# Altium PCB PCB2.pcbdoc
Units mil, origin at the board's own origin, x right, y up, seen from the top; angles counter-clockwise.
Board outline 6141.12 x 9387.74 mil, 2 copper layers (Top Layer, Bottom Layer); 120 components, 101 nets, 359 pads, 4 vias.
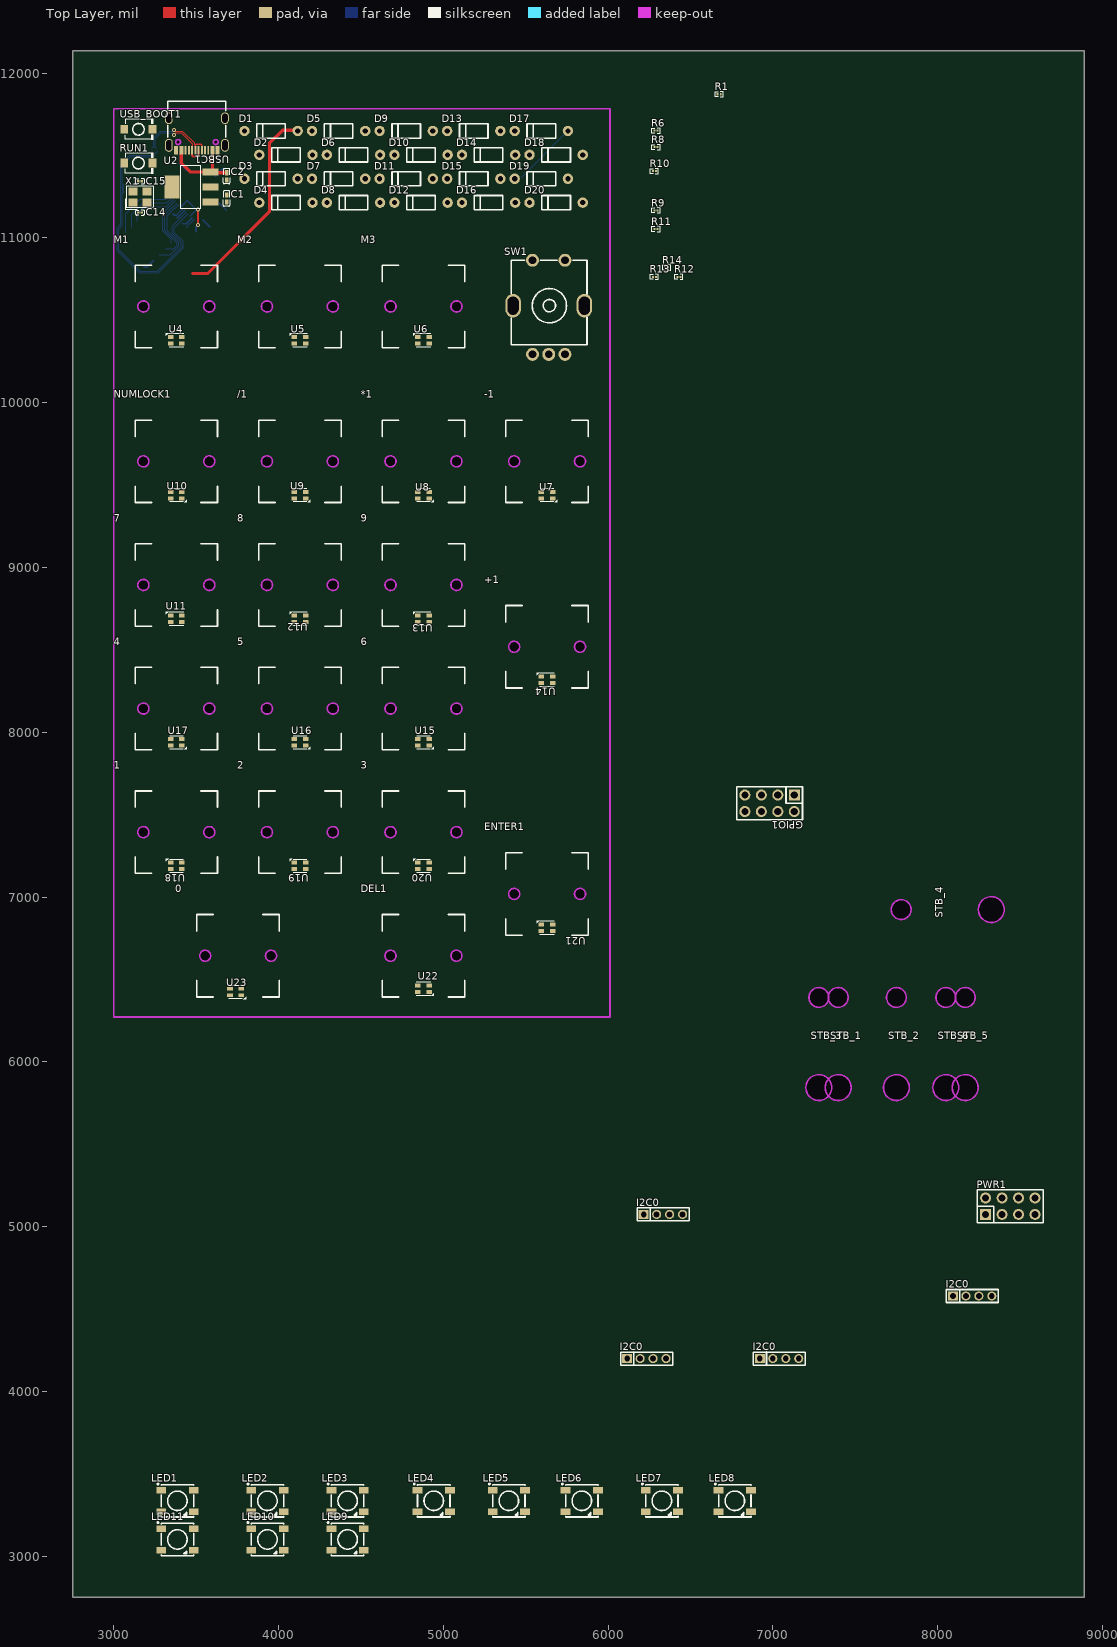
[diagram p0: Top Layer view]
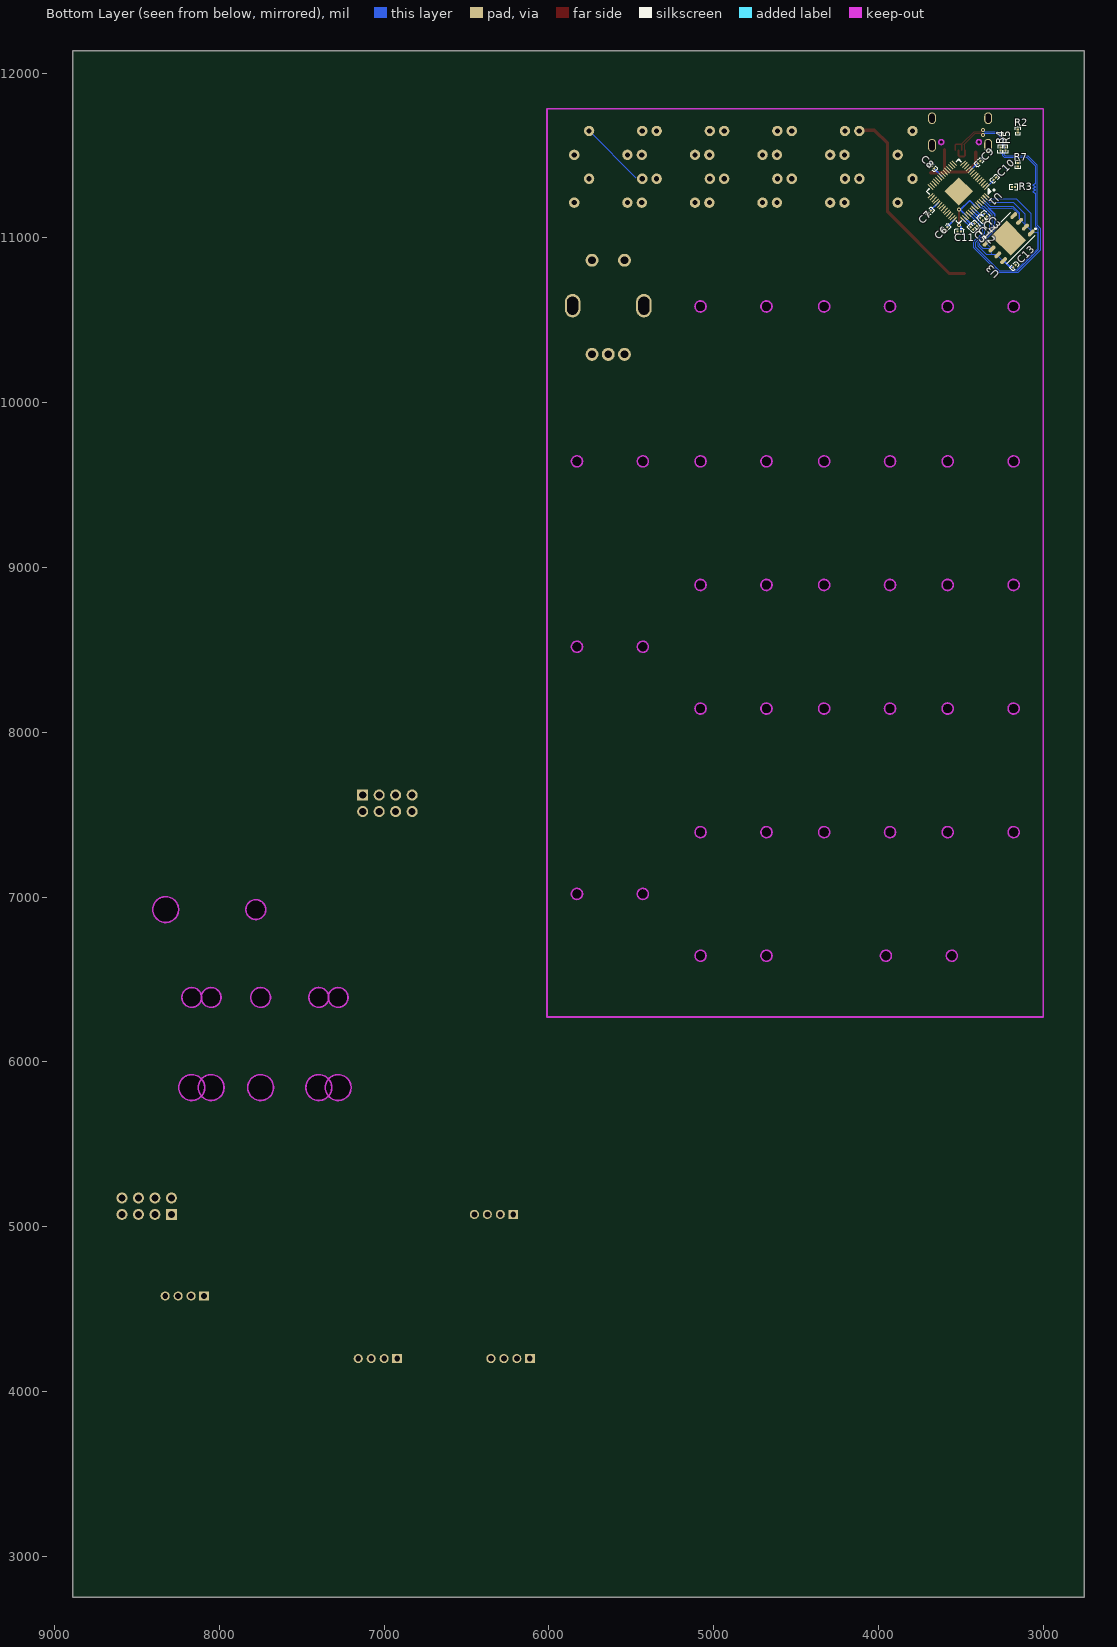
[diagram p1: Bottom Layer view, seen from below]

## Layer stack, top to bottom
Top Layer: signal copper (thickness not stored)
Dielectric: dielectric 12.6, FR-4, Dk 4.8
Bottom Layer: signal copper (thickness not stored)

## Board outline
8891.12,2750 2750,2750 2750,12137.74 8891.12,12137.74

## Design rules (kind name [scope] priority, off if disabled: settings)
BoardOutlineClearance copperThickness1oz [All] p0: genericclearance=10 ignorepadtopadclearanceinfootprint=FALSE except(0: Arc-SplitContinuation Track-SplitContinuation SMDPad-SplitContinuation THPad-SplitContinuation Via-SplitContinuation Fill-SplitContinuation Poly-SplitContinuation Region-SplitContinuation Text-SplitContinuation; 6: Track-CutoutEdge SMDPad-CutoutEdge THPad-CutoutEdge Via-CutoutEdge Fill-CutoutEdge Region-CutoutEdge; 11.8: Track-OutlineEdge SMDPad-OutlineEdge THPad-OutlineEdge Via-OutlineEdge Fill-OutlineEdge Region-OutlineEdge Poly-OutlineEdge Text-OutlineEdge)
BoardOutlineClearance copperThickness2oz [All] p0: genericclearance=10 ignorepadtopadclearanceinfootprint=FALSE except(0: Arc-SplitContinuation Track-SplitContinuation SMDPad-SplitContinuation THPad-SplitContinuation Via-SplitContinuation Fill-SplitContinuation Poly-SplitContinuation Region-SplitContinuation Text-SplitContinuation; 6: Track-CutoutEdge SMDPad-CutoutEdge THPad-CutoutEdge Via-CutoutEdge Fill-CutoutEdge Region-CutoutEdge; 11.8: Track-OutlineEdge SMDPad-OutlineEdge THPad-OutlineEdge Via-OutlineEdge Fill-OutlineEdge Region-OutlineEdge Poly-OutlineEdge Text-OutlineEdge)
Clearance copperThickness1oz [(InNet('23') OR InNet('24') OR InNet('25') OR InNet('26') OR InNet('27') OR InNet('29') OR InNet('3.3V') OR InNet('R1') OR InNet('R2') OR InNet('R3') OR InNet('R4') OR InNet('R5') OR InNet('R6') OR InNet('C1') OR InNet('C2') OR InNet('C3') OR InNet('C4') OR InNet('GND') OR InNet('XIN') OR InNet('XOUT') OR InNet('1.1V') OR InNet('SWCLK') OR InNet('SWD') OR InNet('$1N4934') OR InNet('SDA0') OR InNet('SCL0') OR InNet('DINUGRGB') OR InNet('DINPKRGB') OR InNet('$1N4906') OR InNet('$1N4905') OR InNet('QSPI_SD3') OR InNet('QSPI_SCLK') OR InNet('QSPI_SD0') OR InNet('QSPI_SD2') OR InNet('QSPI_SD1') OR InNet('QSPI_SS') OR InNet('VCC') OR InNet('DN') OR InNet('DP') OR InNet('$1N4900') OR InNet('$1N4960') OR InNet('$1N7769') OR InNet('$1N7974') OR InNet('$1N7930') OR InNet('$1N7902') OR InNet('$1N8059') OR InNet('$1N9359') OR InNet('$1N9364') OR InNet('$1N9369') OR InNet('$1N9374') OR InNet('$1N9379') OR InNet('$1N9391') OR InNet('$1N9396') OR InNet('$1N9405') OR InNet('$1N9410') OR InNet('$1N9460') OR InNet('$1N9455') OR InNet('$1N9450') OR InNet('$1N4922') OR InNet('$1N4923') OR InNet('$1N4924') OR InNet('$1N4925') OR InNet('$1N4926') OR InNet('$1N4927') OR InNet('$1N4928') OR InNet('$1N9445') OR InNet('$1N9440') OR InNet('$1N9435') OR InNet('$1N9430') OR InNet('$1N9425') OR InNet('$1N9420') OR InNet('$1N9415') OR InNet('+5V') OR InNet('$1N14177') OR InNet('$1N14172') OR InNet('$1N14167') OR InNet('$1N14162') OR InNet('$1N14157') OR InNet('$1N14152') OR InNet('$1N14147') OR InNet('$1N14142') OR InNet('$1N14132') OR InNet('$1N14137') OR InNet('ENCA') OR InNet('ENCB') OR InNet('ENCSW') OR InNet('$1N17828') OR InNet('$1N17831') OR InNet('$1N17877') OR InNet('$1N17918') OR InNet('$1N17901') OR InNet('$1N17953') OR InNet('$1N18004') OR InNet('$1N18027') OR InNet('$1N18061') OR InNet('$1N18142') OR InNet('$1N18187') OR InNet('$1N18170') OR InNet('$1N18112') OR InNet('$1N18211') OR InNet('$1N18228'))] p1: gap=7 ignorepadtopadclearanceinfootprint=FALSE except(4: Track-Track; 6: Track-SMDPad SMDPad-SMDPad Track-THPad SMDPad-THPad THPad-THPad Track-Via SMDPad-Via THPad-Via Via-Via Track-Fill SMDPad-Fill THPad-Fill Via-Fill Fill-Fill Track-Region SMDPad-Region THPad-Region Via-Region Fill-Region Region-Region Track-Poly SMDPad-Poly THPad-Poly Via-Poly Fill-Poly Region-Poly Poly-Poly Track-Text SMDPad-Text THPad-Text Via-Text Fill-Text Region-Text Poly-Text Text-Text Track-Hole SMDPad-Hole THPad-Hole Via-Hole Fill-Hole Region-Hole Poly-Hole Text-Hole; 11.8: Track-Sheet SMDPad-Sheet THPad-Sheet Via-Sheet Fill-Sheet Region-Sheet Poly-Sheet Text-Sheet Sheet-Hole)
Clearance copperThickness2oz [All] p1: gap=7 ignorepadtopadclearanceinfootprint=FALSE except(6: Track-SMDPad SMDPad-SMDPad Track-THPad SMDPad-THPad THPad-THPad Track-Via SMDPad-Via THPad-Via Via-Via Track-Fill SMDPad-Fill THPad-Fill Via-Fill Fill-Fill Track-Region SMDPad-Region THPad-Region Via-Region Fill-Region Region-Region Track-Poly SMDPad-Poly THPad-Poly Via-Poly Fill-Poly Region-Poly Poly-Poly Track-Text SMDPad-Text THPad-Text Via-Text Fill-Text Region-Text Poly-Text Text-Text Track-Hole SMDPad-Hole THPad-Hole Via-Hole Fill-Hole Region-Hole Poly-Hole Text-Hole; 8: Track-Track; 11.8: Track-Sheet SMDPad-Sheet THPad-Sheet Via-Sheet Fill-Sheet Region-Sheet Poly-Sheet Text-Sheet Sheet-Hole)
DiffPairsRouting differentialPair [All] p1: maxuncoupledlength=10 minlimit=5.9843 maxlimit=5.9843 mostfreqgap=5.9843 toplayer_minwidth=5 toplayer_prefwidth=10 toplayer_maxwidth=100 bottomlayer_minwidth=5 bottomlayer_prefwidth=10 bottomlayer_maxwidth=100
PasteMaskExpansion pasteMaskExpansion [All] p1: expansion=0
PlaneConnect innerPlane [All] p1: planeconnectstyle=Relief reliefexpansion=20 reliefentries=4 reliefconductorwidth=10 reliefairgap=10
PolygonConnect copperRegion [All] p1: connectstyle=Direct reliefentries=4 reliefconductorwidth=10 polygonreliefangle="90 Angle" airgapwidth=10
RoutingVias viaSize [All] p1: viastyle="Through Hole" holewidth=12.0078 minholewidth=11.811 maxholewidth=248.0314 width=24.0158 minwidth=19.685 maxwidth=393.7008
SolderMaskExpansion solderMaskExpansion [All] p1: useseparateexpansions=TRUE expansion=2.0079 expansionbottom=2.0079
Width copperThickness1oz [All] p1: maxlimit=100 minlimit=5 preferedwidth=10
Width copperThickness2oz [All] p1: maxlimit=100 minlimit=8 preferedwidth=10

## Components (designator, comment, footprint, x,y, rotation, side; value= is the part's Value field where it differs from the comment)
0 "CHERRY-MX-SW-1U" CHERRY-MX-PCB-1U 3755,6644.45 r0 top
1 "CHERRY-MX-SW-1U" CHERRY-MX-PCB-1U 3380,7394.45 r0 top
2 "CHERRY-MX-SW-1U" CHERRY-MX-PCB-1U 4130,7394.45 r0 top
3 "CHERRY-MX-SW-1U" CHERRY-MX-PCB-1U 4880,7394.45 r0 top
4 "CHERRY-MX-SW-1U" CHERRY-MX-PCB-1U 3380,8144.45 r0 top
5 "CHERRY-MX-SW-1U" CHERRY-MX-PCB-1U 4130,8144.45 r0 top
6 "CHERRY-MX-SW-1U" CHERRY-MX-PCB-1U 4880,8144.45 r0 top
7 "CHERRY-MX-SW-1U" CHERRY-MX-PCB-1U 3380,8894.45 r0 top
8 "CHERRY-MX-SW-1U" CHERRY-MX-PCB-1U 4130,8894.45 r0 top
9 "CHERRY-MX-SW-1U" CHERRY-MX-PCB-1U 4880,8894.45 r0 top
*1 "CHERRY-MX-SW-1U" CHERRY-MX-PCB-1U 4880,9644.45 r0 top
+1 "CHERRY-MX-SW-1U" CHERRY-MX-PCB-1U 5630,8519.45 r0 top
-1 "CHERRY-MX-SW-1U" CHERRY-MX-PCB-1U 5630,9644.45 r0 top
/1 "CHERRY-MX-SW-1U" CHERRY-MX-PCB-1U 4130,9644.45 r0 top
C1 "CL05A106MQ5NUNC" C0402 3685,11239.45 r90 top
C2 "CL05A106MQ5NUNC" C0402 3685,11374.45 r90 top
C3 "CL03A104KO3NNNC" C0201 3350,11139.45 r45 bottom
C4 "CL03A104KO3NNNC" C0201 3375,11114.45 r45 bottom
C5 "CL03A104KO3NNNC" C0201 3433.07,11058.59 r45 bottom
C6 "CL03A104KO3NNNC" C0201 3590,11059.45 r135 bottom
C7 "CL03A104KO3NNNC" C0201 3690,11159.45 r135 bottom
C8 "CL03A104KO3NNNC" C0201 3670,11429.45 r225 bottom
C9 "CL03A104KO3NNNC" C0201 3390,11459.45 r315 bottom
C10 "CL03A104KO3NNNC" C0201 3295,11359.45 r315 bottom
C11 "CL03A105MQ3CSNH" C0201 3510,11039.45 r180 bottom
C12 "CL03A105MQ3CSNH" C0201 3410,11079.45 r225 bottom
C13 "CL03A104KO3NNNC" C0201 3175,10829.45 r315 bottom
C14 "C0603NP0300KGTS" C0201 3160,11154.45 r0 top
C15 "C0603NP0300KGTS" C0201 3160,11344.45 r0 top
D1 "1N4148_C14538" DO-35_BD2.0-L4.2-P8.20-D0.5-RD 3955,11649.45 r0 top
D2 "1N4148_C14538" DO-35_BD2.0-L4.2-P8.20-D0.5-RD 4045,11504.45 r0 top
D3 "1N4148_C14538" DO-35_BD2.0-L4.2-P8.20-D0.5-RD 3955,11359.45 r0 top
D4 "1N4148_C14538" DO-35_BD2.0-L4.2-P8.20-D0.5-RD 4045,11214.45 r0 top
D5 "1N4148_C14538" DO-35_BD2.0-L4.2-P8.20-D0.5-RD 4365,11649.45 r0 top
D6 "1N4148_C14538" DO-35_BD2.0-L4.2-P8.20-D0.5-RD 4455,11504.45 r0 top
D7 "1N4148_C14538" DO-35_BD2.0-L4.2-P8.20-D0.5-RD 4365,11359.45 r0 top
D8 "1N4148_C14538" DO-35_BD2.0-L4.2-P8.20-D0.5-RD 4455,11214.45 r0 top
D9 "1N4148_C14538" DO-35_BD2.0-L4.2-P8.20-D0.5-RD 4775,11649.45 r0 top
D10 "1N4148_C14538" DO-35_BD2.0-L4.2-P8.20-D0.5-RD 4865,11504.45 r0 top
D11 "1N4148_C14538" DO-35_BD2.0-L4.2-P8.20-D0.5-RD 4775,11359.45 r0 top
D12 "1N4148_C14538" DO-35_BD2.0-L4.2-P8.20-D0.5-RD 4865,11214.45 r0 top
D13 "1N4148_C14538" DO-35_BD2.0-L4.2-P8.20-D0.5-RD 5185,11649.45 r0 top
D14 "1N4148_C14538" DO-35_BD2.0-L4.2-P8.20-D0.5-RD 5275,11504.45 r0 top
D15 "1N4148_C14538" DO-35_BD2.0-L4.2-P8.20-D0.5-RD 5185,11359.45 r0 top
D16 "1N4148_C14538" DO-35_BD2.0-L4.2-P8.20-D0.5-RD 5275,11214.45 r0 top
D17 "1N4148_C14538" DO-35_BD2.0-L4.2-P8.20-D0.5-RD 5595,11649.45 r0 top
D18 "1N4148_C14538" DO-35_BD2.0-L4.2-P8.20-D0.5-RD 5685,11504.45 r0 top
D19 "1N4148_C14538" DO-35_BD2.0-L4.2-P8.20-D0.5-RD 5595,11359.45 r0 top
D20 "1N4148_C14538" DO-35_BD2.0-L4.2-P8.20-D0.5-RD 5685,11214.45 r0 top
DEL1 "CHERRY-MX-SW-1U" CHERRY-MX-PCB-1U 4880,6644.45 r0 top
ENTER1 "CHERRY-MX-SW-1U" CHERRY-MX-PCB-1U 5630,7019.45 r0 top
GPIO1 "PZ254V-12-8P" HDR-TH_8P-P2.54-V-M-R2-C4-S2.54 6980,7569.45 r180 top
I2C0 "PZ200V-11-04P" HDR-TH_4P-P2.00-V-M 8210.62,4579.79 r0 top
I2C0 "PZ200V-11-04P" HDR-TH_4P-P2.00-V-M 6234.06,4199.79 r0 top
I2C0 "PZ200V-11-04P" HDR-TH_4P-P2.00-V-M 7038.96,4199.79 r0 top
I2C0 "PZ200V-11-04P" HDR-TH_4P-P2.00-V-M 6334.27,5074.79 r0 top
LED1 "WS2812B-B" LED-SMD_4P-L5.0-W5.0-BL_TC5050RGB 3386.6,3336.77 r0 top
LED2 "WS2812B-B" LED-SMD_4P-L5.0-W5.0-BL_TC5050RGB 3933.04,3336.77 r0 top
LED3 "WS2812B-B" LED-SMD_4P-L5.0-W5.0-BL_TC5050RGB 4419.49,3336.77 r0 top
LED4 "WS2812B-B" LED-SMD_4P-L5.0-W5.0-BL_TC5050RGB 4942.03,3336.77 r0 top
LED5 "WS2812B-B" LED-SMD_4P-L5.0-W5.0-BL_TC5050RGB 5397.85,3336.77 r0 top
LED6 "WS2812B-B" LED-SMD_4P-L5.0-W5.0-BL_TC5050RGB 5840.61,3336.77 r0 top
LED7 "WS2812B-B" LED-SMD_4P-L5.0-W5.0-BL_TC5050RGB 6326.37,3336.77 r0 top
LED8 "WS2812B-B" LED-SMD_4P-L5.0-W5.0-BL_TC5050RGB 6769.13,3336.77 r0 top
LED9 "WS2812B-B" LED-SMD_4P-L5.0-W5.0-BL_TC5050RGB 4419.49,3102.36 r0 top
LED10 "WS2812B-B" LED-SMD_4P-L5.0-W5.0-BL_TC5050RGB 3933.04,3102.36 r0 top
LED11 "WS2812B-B" LED-SMD_4P-L5.0-W5.0-BL_TC5050RGB 3386.6,3102.36 r0 top
M1 "CHERRY-MX-SW-1U" CHERRY-MX-PCB-1U 3380,10584.45 r0 top
M2 "CHERRY-MX-SW-1U" CHERRY-MX-PCB-1U 4130,10584.45 r0 top
M3 "CHERRY-MX-SW-1U" CHERRY-MX-PCB-1U 4880,10584.45 r0 top
NUMLOCK1 "CHERRY-MX-SW-1U" CHERRY-MX-PCB-1U 3380,9644.45 r0 top
PWR1 "PZ254V-12-8P" HDR-TH_8P-P2.54-V-M-R2-C4-S2.54 8441.12,5124.79 r0 top
R1 "RC0201FR-0710KL" R0201 6674.39,11872.36 r0 top
R2 "RC0201FR-071KL" R0201 3155,11649.45 r270 bottom
R3 "RC0201FR-071KL" R0201 3180,11309.45 r180 bottom
R4 "RC0201JR-0727RL" R0201 3260,11539.45 r90 bottom
R5 "RC0201JR-0727RL" R0201 3230,11539.45 r90 bottom
R6 "RC0201FR-0710KL" R0201 6290.91,11651.13 r0 top
R7 "RC0201FR-071KL" R0201 3155,11444.45 r90 bottom
R8 "RC0201FR-0710KL" R0201 6290.91,11551.77 r0 top
R9 "RC0201FR-0710KL" R0201 6290.91,11167.36 r0 top
R10 "RC0201FR-0710KL" R0201 6280.91,11405.92 r0 top
R11 "RC0201FR-0710KL" R0201 6290.91,11054.48 r0 top
R12 "RC0201FR-0710KL" R0201 6430.19,10764.43 r0 top
R13 "RC0201FR-0710KL" R0201 6280.91,10764.43 r0 top
R14 "RC0201FR-0710KL" R0201 6355.55,10820.87 r0 top
RUN1 "TS-1088-AR02016" SW-SMD_L3.9-W3.0-P4.45 3150,11454.45 r0 top
STB_1 "Cherry MX Stabilizer" "CHERRY MX SWITCH STAB"#1 7396.58,6110.16 r0 top
STB_2 "Cherry MX Stabilizer" "CHERRY MX SWITCH STAB"#1 7749.71,6110.16 r0 top
STB_3 "Cherry MX Stabilizer" "CHERRY MX SWITCH STAB"#1 7278.88,6110.16 r0 top
STB_4 "Cherry MX Stabilizer" "CHERRY MX SWITCH STAB"#2 8060,6924.45 r90 top
STB_5 "Cherry MX Stabilizer" "CHERRY MX SWITCH STAB"#1 8167.42,6110.16 r0 top
STB_6 "Cherry MX Stabilizer" "CHERRY MX SWITCH STAB"#1 8049.71,6110.16 r0 top
SW1 "EC111012000Y" SW-TH_EC111012000Y 5640,10579.45 r0 top
U1 "RP2040_C2040" LQFN-56_L7.0-W7.0-P0.4-EP 3513.42,11282.64 r315 bottom
U2 "AMS1117-3.3_C6186" SOT-223-3_L6.5-W3.4-P2.30-LS7.0-BR 3470,11309.45 r0 top
U3 "W25Q128JVPIQ" WSON-8_L6.0-W5.0-P1.27-BL-EP 3210,10999.45 r45 bottom
U4 "XL-2121RGBC-WS2812B" LED-SMD_4P-L2.1-W2.1-BL 3380,10379.45 r180 top
U5 "XL-2121RGBC-WS2812B" LED-SMD_4P-L2.1-W2.1-BL 4130,10379.45 r180 top
U6 "XL-2121RGBC-WS2812B" LED-SMD_4P-L2.1-W2.1-BL 4880,10379.45 r180 top
U7 "XL-2121RGBC-WS2812B" LED-SMD_4P-L2.1-W2.1-BL 5630,9439.45 r0 top
U8 "XL-2121RGBC-WS2812B" LED-SMD_4P-L2.1-W2.1-BL 4880,9439.45 r0 top
U9 "XL-2121RGBC-WS2812B" LED-SMD_4P-L2.1-W2.1-BL 4130,9439.45 r0 top
U10 "XL-2121RGBC-WS2812B" LED-SMD_4P-L2.1-W2.1-BL 3380,9439.45 r0 top
U11 "XL-2121RGBC-WS2812B" LED-SMD_4P-L2.1-W2.1-BL 3380,8689.45 r180 top
U12 "XL-2121RGBC-WS2812B" LED-SMD_4P-L2.1-W2.1-BL 4130,8689.45 r180 top
U13 "XL-2121RGBC-WS2812B" LED-SMD_4P-L2.1-W2.1-BL 4880,8689.45 r180 top
U14 "XL-2121RGBC-WS2812B" LED-SMD_4P-L2.1-W2.1-BL 5630,8319.45 r180 top
U15 "XL-2121RGBC-WS2812B" LED-SMD_4P-L2.1-W2.1-BL 4880,7939.45 r0 top
U16 "XL-2121RGBC-WS2812B" LED-SMD_4P-L2.1-W2.1-BL 4130,7939.45 r0 top
U17 "XL-2121RGBC-WS2812B" LED-SMD_4P-L2.1-W2.1-BL 3380,7939.45 r0 top
U18 "XL-2121RGBC-WS2812B" LED-SMD_4P-L2.1-W2.1-BL 3380,7189.45 r180 top
U19 "XL-2121RGBC-WS2812B" LED-SMD_4P-L2.1-W2.1-BL 4130,7189.45 r180 top
U20 "XL-2121RGBC-WS2812B" LED-SMD_4P-L2.1-W2.1-BL 4880,7189.45 r180 top
U21 "XL-2121RGBC-WS2812B" LED-SMD_4P-L2.1-W2.1-BL 5630,6814.45 r180 top
U22 "XL-2121RGBC-WS2812B" LED-SMD_4P-L2.1-W2.1-BL 4880,6444.45 r0 top
U23 "XL-2121RGBC-WS2812B" LED-SMD_4P-L2.1-W2.1-BL 3740,6424.45 r0 top
USB_BOOT1 "TS-1088-AR02016" SW-SMD_L3.9-W3.0-P4.45 3150,11659.45 r0 top
USBC1 "TYPE-C-31-M-12" USB-C_SMD-TYPE-C-31-M-12 3505,11629.45 r180 top
X1 "TAXM12M4RLBDDT2T" CRYSTAL-SMD_4P-L3.2-W2.5-BL 3160,11249.45 r0 top

## Footprints (in the part's own frame and the unit in brackets; to place one, negate y for a bottom-side part, rotate by r counter-clockwise, add the part's x,y. Pads: shape width x height; smd on the part's side, far side on the other; paste and mask are expansions set on the pad)
C0201 [mil]
  rect 14.51x12.76 smd: 1(-10.8,0) 2(10.8,0)
  silkscreen extent -27,-15 27,15
C0402 [mm]
  rect 0.79x0.54 smd: 1(-0.545,0) 2(0.545,0)
  silkscreen extent -1.17,-0.5 1.17,0.5
"CHERRY MX SWITCH STAB"#1 [mil]
  Board Outline Layer circle w0.2: c0,281.2 r60
  Board Outline Layer circle w0.2: c0,-265.7 r78.5
  Board Outline Layer circle w10: c0,281.2 r60
  Board Outline Layer circle w10: c0,-265.7 r78.5
  Multi-Layer board cut-out: 60,281.2 54.06,307.23 37.41,328.11 13.35,339.7 -13.35,339.7 -37.41,328.11 -54.06,307.24 -60,281.2 -60,281.2 -54.06,255.17 -37.41,234.29 -13.36,222.7 13.35,222.7 37.41,234.29 54.06,255.17 60,281.2
  Multi-Layer board cut-out: 78.5,-265.7 70.73,-231.64 48.94,-204.32 17.47,-189.17 -17.47,-189.16 -48.95,-204.32 -70.73,-231.64 -78.5,-265.7 -78.5,-265.7 -70.73,-299.76 -48.95,-327.07 -17.47,-342.23 17.46,-342.23 48.94,-327.07 70.73,-299.76 78.5,-265.7
"CHERRY MX SWITCH STAB"#2 [mil]
  Board Outline Layer circle w0.2: c0,281.2 r60
  Board Outline Layer circle w0.2: c0,-265.7 r78.5
  Board Outline Layer circle w10: c0,281.2 r60
  Board Outline Layer circle w10: c0,-265.7 r78.5
  Multi-Layer board cut-out: 0,221.2 26.03,227.14 46.91,243.79 58.49,267.85 58.49,294.55 46.91,318.61 26.03,335.26 0,341.2 0,341.2 -26.04,335.26 -46.91,318.61 -58.5,294.55 -58.5,267.85 -46.91,243.79 -26.03,227.14 0,221.2
  Multi-Layer board cut-out: 0,-344.2 34.06,-336.43 61.37,-314.64 76.53,-283.17 76.53,-248.23 61.37,-216.75 34.06,-194.97 0,-187.2 0,-187.2 -34.06,-194.97 -61.38,-216.76 -76.53,-248.23 -76.53,-283.17 -61.37,-314.65 -34.06,-336.43 0,-344.2
CHERRY-MX-PCB-1U [mil]
  Board Outline Layer circle w1: c-200,0 r33.5
  Board Outline Layer circle w1: c200,0 r33.5
  Board Outline Layer circle w10: c-200,0 r33.5
  Board Outline Layer circle w10: c200,0 r33.5
  Multi-Layer board cut-out: -166.5,0 -169.82,14.53 -179.11,26.19 -192.55,32.66 -207.46,32.66 -220.89,26.19 -230.18,14.53 -233.5,0 -233.5,0 -230.18,-14.54 -220.89,-26.19 -207.45,-32.66 -192.54,-32.66 -179.11,-26.19 -169.82,-14.54 -166.5,0
  Multi-Layer board cut-out: 233.5,0 230.18,14.53 220.89,26.19 207.45,32.66 192.54,32.66 179.11,26.19 169.82,14.53 166.5,0 166.5,0 169.82,-14.54 179.11,-26.19 192.55,-32.66 207.46,-32.66 220.89,-26.19 230.18,-14.54 233.5,0
  silkscreen extent -250,-250 250,250
CRYSTAL-SMD_4P-L3.2-W2.5-BL [mm]
  rect 1.4x1.2 smd: 1(-1.1,-0.85) 2(1.1,-0.85) 3(1.1,0.85) 4(-1.1,0.85)
  silkscreen extent -2.26,-1.91 2.03,1.68
DO-35_BD2.0-L4.2-P8.20-D0.5-RD [mm]
  round 1.6 hole 0.8: 1(-4.1,0) 2(4.1,0)
  silkscreen extent -2.2,-1.1 2.2,1.1
HDR-TH_4P-P2.00-V-M [mm]
  rect 1.524x1.4 hole 0.9: 1(-3,0)
  round 1.4 hole 0.9: 2(-1,0) 3(1,0) 4(3,0)
  silkscreen extent -4,-1 4,1.02
HDR-TH_8P-P2.54-V-M-R2-C4-S2.54 [mm]
  rect 1.7x1.7 hole 1.1: 1(-3.81,-1.27)
  round 1.7 hole 1.1: 2(-3.81,1.27) 3(-1.27,-1.27) 4(-1.27,1.27) 5(1.27,-1.27) 6(1.27,1.27) 7(3.81,-1.27) 8(3.81,1.27)
  silkscreen extent -5.08,-2.54 5.08,2.54
LED-SMD_4P-L2.1-W2.1-BL [mm]
  rect 0.85x0.6 smd: 1(-0.87,-0.5) 2(0.87,-0.5) 3(0.87,0.5) 4(-0.87,0.5)
  silkscreen extent -1.05,-1.1 1.6,1.05
LED-SMD_4P-L5.0-W5.0-BL_TC5050RGB [mm]
  rect 1.5x1 smd: 1(-2.5,1.65) 2(-2.5,-1.65) 3(2.5,-1.65) 4(2.5,1.65)
  silkscreen extent -3.1,-2.5 2.5,2.7
LQFN-56_L7.0-W7.0-P0.4-EP [mm]
  rect 1.1x0.2 smd: 1(-3.55,2.6) 2(-3.55,2.2) 3(-3.55,1.8) 4(-3.55,1.4) 5(-3.55,1) 6(-3.55,0.6) 7(-3.55,0.2) 8(-3.55,-0.2) 9(-3.55,-0.6) 10(-3.55,-1) 11(-3.55,-1.4) 12(-3.55,-1.8) 13(-3.55,-2.2) 14(-3.55,-2.6) 29(3.55,-2.6) 30(3.55,-2.2) 31(3.55,-1.8) 32(3.55,-1.4) 33(3.55,-1) 34(3.55,-0.6) 35(3.55,-0.2) 36(3.55,0.2) 37(3.55,0.6) 38(3.55,1) 39(3.55,1.4) 40(3.55,1.8) 41(3.55,2.2) 42(3.55,2.6)
  rect 0.2x1.1 smd: 15(-2.6,-3.55) 16(-2.2,-3.55) 17(-1.8,-3.55) 18(-1.4,-3.55) 19(-1,-3.55) 20(-0.6,-3.55) 21(-0.2,-3.55) 22(0.2,-3.55) 23(0.6,-3.55) 24(1,-3.55) 25(1.4,-3.55) 26(1.8,-3.55) 27(2.2,-3.55) 28(2.6,-3.55) 43(2.6,3.55) 44(2.2,3.55) 45(1.8,3.55) 46(1.4,3.55) 47(1,3.55) 48(0.6,3.55) 49(0.2,3.55) 50(-0.2,3.55) 51(-0.6,3.55) 52(-1,3.55) 53(-1.4,3.55) 54(-1.8,3.55) 55(-2.2,3.55) 56(-2.6,3.55)
  rect 3.1x3.1 smd: 57(0,0)
  silkscreen extent -4.13,-3.5 3.5,3.83
R0201 [mil]
  rect 11.93x12.76 smd: 1(-9.51,0) 2(9.51,0)
  silkscreen extent -24,-15 24,15
SOT-223-3_L6.5-W3.4-P2.30-LS7.0-BR [mm]
  rect 2.5x1.1 smd: 1(2.97,-2.3) 2(2.97,0) 3(2.97,2.3)
  rect 2.34x3.6 smd: 4(-2.97,0)
  silkscreen extent -1.57,-3.33 1.37,3.33
SW-SMD_L3.9-W3.0-P4.45 [mm]
  rect 1.23x1.36 smd: 1(-2.185,0) 2(2.185,0)
  silkscreen extent -2.03,-1.62 2.25,1.62
SW-TH_EC111012000Y [mm]
  oval 2.4x3.6 hole 1.7 slot 2.8 at 90 deg: 6(-5.5,0.25) 7(5.5,0.25)
  round 2 hole 1.2: A(-2.5,-7.25) B(2.5,-7.25) C(0,-7.25) D(-2.5,7.25) E(2.5,7.25)
  silkscreen extent -5.8,-5.75 5.9,7.25
USB-C_SMD-TYPE-C-31-M-12 [mm]
  oval 1.2x2 hole 0.8 slot 1.6 at 90 deg: 0(-4.325,1.706) 1(4.325,1.706)
  oval 1.2x1.8 hole 0.8 slot 1.4 at 90 deg: 2(4.325,-2.474) 3(-4.325,-2.474)
  rect 0.3x1.3 smd: A1(-3.35,2.474) A4(-2.55,2.474) A5(-1.25,2.474) A6(-0.25,2.474) A7(0.25,2.474) A8(1.25,2.474) A9(2.55,2.474) A12(3.35,2.474) B1(3.05,2.474) B4(2.25,2.474) B5(1.75,2.474) B6(0.75,2.474) B7(-0.75,2.474) B8(-1.75,2.474) B9(-2.25,2.474) B12(-3.05,2.474)
  Board Outline Layer circle w0.005: c-2.9,1.206 r0.375
  Board Outline Layer circle w0.005: c2.9,1.206 r0.375
  Board Outline Layer circle w0.254: c-2.9,1.206 r0.375
  Board Outline Layer circle w0.254: c2.9,1.206 r0.375
  Multi-Layer board cut-out: -3.275,1.206 -3.223,1.021 -3.086,0.886 -2.9,0.837 -2.714,0.886 -2.577,1.021 -2.525,1.206 -2.525,1.206 -2.577,1.39 -2.714,1.525 -2.9,1.574 -3.086,1.525 -3.223,1.391 -3.275,1.206
  Multi-Layer board cut-out: 2.525,1.206 2.577,1.021 2.714,0.886 2.9,0.837 3.086,0.886 3.223,1.021 3.275,1.206 3.275,1.206 3.223,1.39 3.086,1.525 2.9,1.574 2.714,1.525 2.577,1.391 2.525,1.206
  silkscreen extent -4.47,-5.09 4.47,0.49
WSON-8_L6.0-W5.0-P1.27-BL-EP [mm]
  oval 0.581x1.276 smd: 1(-1.905,-3.013) 2(-0.635,-3.013) 3(0.635,-3.013) 4(1.905,-3.013) 5(1.905,3.013) 6(0.635,3.013) 7(-0.635,3.013) 8(-1.905,3.013)
  rect 4.3x3.4 smd: 9(0,0)
  silkscreen extent -2.58,-4.05 2.58,3.08

## Via types
v1: diameter 24.02, hole 12.01, Top Layer to Bottom Layer, 4 vias

## Nets (pads, with @x,y where several pads share a name; then routed paths per layer and width w, separated by ;. In a path a pad name is that pad's centre, name@x,y a point inside that pad or via, vN(x,y) a via of type N, cw(c..) or ccw(c..) an arc to the next point about the centre after c; other vN are vias at no path point)
1.1V: C11.2 U1.23 U1.45 U1.50 | length 332.6
  Top Layer w10: v1(3511.81,11079.45) v1(3511.81,11172.76)
  Bottom Layer w10: U1.50 3444.09,11224.45 3450,11224.45 v1@3500,11174.45 ; U1.45 3500,11169.01 v1@3500,11174.45 ; C11.2 3499.2,11066.84 v1(3511.81,11079.45) ; v1(3511.81,11172.76) 3501.69,11172.76 v1@3500,11174.45
3.3V: C1.2 C3.2 C4.2 C5.2 C6.2 C7.2 C8.2 C9.2 C10.2 C12.1 C13.2 R1.2 R7.1 R12.2 R13.1 R14.1 U1.1 U1.10 U1.22 U1.33 U1.42 U1.43 U1.44 U1.48 U1.49 U2.2 U2.4 U3.8 | length 672.1
  Bottom Layer w10: C13.2 3200.1,10821.82 U3.8 ; C10.2 3302.64,11348.67 U1.1 ; C3.2 3357.64,11146.82 3365,11139.45 3381.36,11139.45 U1.49 ; C4.2 3386.27,11122.09 U1.48 ; C9.2 3399.92,11451.82 U1.10 ; C12.1 3440.36,11087.09 U1.44 ; C5.2 3441.76,11066.23 U1.43 ; U1.42 3582.36,11068.94 C6.2 ; U1.22 3662.36,11420.45 C8.2 ; U1.33 3682.36,11169.38 C7.2
23: GPIO1.2 U1.35
24: GPIO1.4 U1.36
25: GPIO1.6 U1.37
26: GPIO1.8 U1.38
27: GPIO1.1 U1.39
29: GPIO1.5 U1.41
$1N4900: R2.1 USB_BOOT1.2
$1N4905: R4.1 U1.47 | length 1574.1
  Bottom Layer w5: R4.1 3260,11519.48 3250.5,11509.98 3250.5,11502.92 3236.03,11488.45 3099,11488.45 3050,11439.45 3050,11330.41 ccw(c3055,11330.41) 3055,11325.41 cw(c3055,11320.41) 3055,11315.41 ccw(c3055,11310.41) 3055,11305.41 cw(c3055,11300.41) 3055,11295.41 ccw(c3055,11290.41) 3055,11285.41 cw(c3055,11280.41) 3055,11275.41 ccw(c3055,11270.41) 3050,11270.41 3050,11074.45 3030,11054.45 3030,10929.45 3160,10799.45 3265,10799.45 3410,10944.45 3410,10974.45 3356.78,11027.68 3356.78,11071.79 3440.97,11155.98 U1.47
$1N4906: R5.1 U1.46 | length 1566.2
  Bottom Layer w5: R5.1 3230,11519.48 3239.5,11509.98 3239.5,11507.48 3231.48,11499.45 3094.44,11499.45 3039,11444.01 3039,11079.01 3019,11059.01 3019,10924.9 3155.44,10788.45 3269.56,10788.45 3421,10939.9 3421,10979.01 3367.78,11032.23 3367.78,11062.23 3450.39,11144.84 U1.46
$1N4922: U1.16
$1N4923: U1.17
$1N4924: U1.18
$1N4925: U1.27
$1N4926: U1.28
$1N4927: U1.29
$1N4928: U1.30
$1N4934: R7.2 RUN1.2 U1.26
$1N4960: C15.2 R3.2 X1.3
$1N7769: D1.2 | length 1242
  Top Layer w20: 3480,10784.45 3570,10784.45 3945,11159.45 3945,11574.45 4025,11654.45 4111.42,11654.45 D1.2
$1N7902: D2.2
$1N7930: D12.2
$1N7974: D13.2
$1N8059: D20.2
$1N9359: U4.4 U5.2
$1N9364: U5.4 U6.2
$1N9369: U6.4 U7.2
$1N9374: U7.4 U8.2
$1N9379: U8.4 U9.2
$1N9391: U9.4 U10.2
$1N9396: U10.4 U11.2
$1N9405: U11.4 U12.2
$1N9410: U12.4 U13.2
$1N9415: U13.4 U14.2
$1N9420: U14.4 U15.2
$1N9425: U15.4 U16.2
$1N9430: U16.4 U17.2
$1N9435: U17.4 U18.2
$1N9440: U18.4 U19.2
$1N9445: U19.4 U20.2
$1N9450: U20.4 U21.2
$1N9455: U21.4 U22.2
$1N9460: U22.4 U23.2
$1N14132: LED10.4 LED11.2
$1N14137: LED9.4 LED10.2
$1N14142: LED8.4 LED9.2
$1N14147: LED7.4 LED8.2
$1N14152: LED6.4 LED7.2
$1N14157: LED5.4 LED6.2
$1N14162: LED4.4 LED5.2
$1N14167: LED3.4 LED4.2
$1N14172: LED2.4 LED3.2
$1N14177: LED1.4 LED2.2
$1N17828: D3.2
$1N17831: D17.2 | length 400.8
  Bottom Layer w5: 5473.01,11366.05 D17.2
$1N17877: D4.2
$1N17901: D14.2
$1N17918: D5.2
$1N17953: D6.2
$1N18004: D7.2
$1N18027: D16.2
$1N18061: D8.2
$1N18112: D9.2
$1N18142: D18.2
$1N18170: D19.2
$1N18187: D10.2
$1N18211: D15.2
$1N18228: D11.2
+5V: LED1.1 LED2.1 LED3.1 LED4.1 LED5.1 LED6.1 LED7.1 LED8.1 LED9.1 LED10.1 LED11.1
C1: U1.8
C2: U1.9
C3: U1.11
C4: U1.12
DINPKRGB: U1.40 U4.2
DINUGRGB: LED11.4 U1.34
DN: R5.2 USBC1.A7 USBC1.B7 | length 491.4
  Top Layer w5: v1(3365.5,11654.95) 3375,11645.45 3418.9,11645.45 3490.82,11573.54 3490.82,11566.48 3495.16,11562.14
  Top Layer w10: USBC1.A7 3495.16,11562.14 3495.16,11564.61 3500,11569.45 3529.71,11569.45 3534.53,11564.64 USBC1.B7
  Bottom Layer w5: R5.2 3237.23,11548.96 3239,11550.73 3239,11604.01 3280.44,11645.45 3356,11645.45 v1(3365.5,11654.95)
DP: R4.2 USBC1.A6 USBC1.B6 | length 486.5
  Top Layer w5: v1(3365.5,11624.95) 3375,11634.45 3414.34,11634.45 3479.82,11568.98 3479.82,11566.48 3475.47,11562.14 USBC1.B6
  Top Layer w10: USBC1.B6 3475.47,11498.98 3480,11494.45 3509.84,11494.45 3514.84,11499.46 USBC1.A6
  Bottom Layer w5: R4.2 3251.77,11548.96 3250,11550.73 3250,11599.45 3285,11634.45 3356,11634.45 v1(3365.5,11624.95)
ENCA: R13.2 SW1.A U1.13
ENCB: R12.1 SW1.B U1.14
ENCSW: SW1.D U1.15
GND: C1.1 C2.1 C3.1 C4.1 C5.1 C6.1 C7.1 C8.1 C9.1 C10.1 C11.1 C12.2 C13.1 C14.2 C15.1 I2C0.1 LED1.3 LED2.3 LED3.3 LED4.3 LED5.3 LED6.3 LED7.3 LED8.3 LED9.3 LED10.3 LED11.3 PWR1.2 PWR1.4 PWR1.6 PWR1.8 R6.1 R8.1 R9.1 R10.1 R11.1 RUN1.1 SW1.6 SW1.7 SW1.C SW1.E U1.19 U1.57 U2.1 U3.4 U3.9 U4.1 U5.1 U6.1 U7.1 U8.1 U9.1 U10.1 U11.1 U12.1 U13.1 U14.1 U15.1 U16.1 U17.1 U18.1 U19.1 U20.1 U21.1 U22.1 U23.1 USB_BOOT1.1 USBC1.0 USBC1.1 USBC1.2 USBC1.3 USBC1.A1 USBC1.A12 USBC1.B1 USBC1.B12 X1.2 X1.4
QSPI_SCLK: U1.52 U3.6 | length 406.4
  Bottom Layer w5: U3.6 3363.81,10933.26 3385,10954.45 3385,10969.45 3310,11044.45 3310,11141.52 3357.93,11189.45 3365,11189.45 3386.76,11211.21 U1.52
QSPI_SD0: U1.53 U3.5 | length 311
  Bottom Layer w5: U3.5 3346.9,10994.8 3295.98,11045.72 3295.98,11147.86 3370.91,11222.79 U1.53
QSPI_SD1: U1.55 U3.2 | length 364.5
  Bottom Layer w5: U3.2 3108.45,11142.91 3180,11214.45 3322.73,11214.45 U1.55
QSPI_SD2: U1.54 U3.3 | length 304.7
  Bottom Layer w5: U3.3 3143.81,11150.51 3182.75,11189.45 3320.01,11189.45 U1.54
QSPI_SD3: U1.51 U3.7 | length 456.3
  Bottom Layer w5: U3.7 3343.45,10897.91 3395,10949.45 3395,10974.45 3324.24,11045.21 3324.24,11135.77 3367.93,11179.45 3375,11179.45 3396.06,11200.52 U1.51
QSPI_SS: R1.1 R2.2 U1.56 U3.1 | length 431.4
  Bottom Layer w5: U3.1 3073.1,11147.55 3160,11234.45 3320,11234.45 3341.74,11256.19 U1.56
R1: D1.1 D2.1 D6.1 D17.1 R6.2 U1.2
R2: D3.1 D7.1 D12.1 D16.1 R8.2 U1.3
R3: D4.1 D8.1 D13.1 D15.1 R9.2 U1.4
R4: D5.1 D9.1 D10.1 D18.1 R10.2 U1.5
R5: D11.1 D14.1 D19.1 D20.1 R11.2 U1.6
R6: U1.7
SCL0: I2C0.3 U1.32
SDA0: I2C0.4 U1.31
SWCLK: U1.24
SWD: U1.25
VCC: C2.2 I2C0.2 PWR1.1 PWR1.3 PWR1.5 PWR1.7 U2.3 U4.3 U5.3 U6.3 U7.3 U8.3 U9.3 U10.3 U11.3 U12.3 U13.3 U14.3 U15.3 U16.3 U17.3 U18.3 U19.3 U20.3 U21.3 U22.3 U23.3 USBC1.A4 USBC1.A9 USBC1.B4 USBC1.B9 | length 491.2
  Top Layer w20: USBC1.A9@3410.39,11522.07 3410.39,11455.1 3464.87,11400.63 U2.3@3587.55,11400.63 ; U2.3 U2.3@3587.55,11400.63 ; U2.3@3589.08,11399.93 3588.39,11400.63 U2.3@3587.55,11400.63 ; USBC1.B9@3598.91,11534.58 3600,11533.49 3600,11413.08 U2.3@3587.55,11400.63 ; U2.3@3601.34,11396.81 3602.73,11395.42 C2.2@3683,11395.42
XIN: C14.1 U1.20 X1.1
XOUT: R3.1 U1.21
pads on no net: GPIO1.3 GPIO1.7 LED1.2 R14.2 U23.4 USBC1.A5 USBC1.A8 USBC1.B5 USBC1.B8

## Polygon pours and split planes (outlines as drawn)
GND on Bottom Layer (solid, pour order 0): 3335,11179.45 3190.89,11179.45 3186.97,11183.37 3150,11146.4 3150,11119.45 3073.1,11042.55 3073.1,11030.29 3068.93,11034.45 3035,11034.45 3035,10934.45 3165,10804.45 3230,10849.45 3285,10899.45 3309.33,10897.91 3311.55,10900.12 3311.55,10933.26 3346.9,10968.62 3346.9,10994.8 3295.98,11045.72 3295.98,11140.44

## Keep-outs
Board Outline Layer:
  lines w10: 3000,6272.72 6011.81,6272.72 6011.81,11784.53 3000,11784.53 3000,6272.72

## Text inside footprints (layer, text, board x,y; h text height)
0: Mech6 "1U" at 4007.05,6272.59 h117.97
1: Mech6 "1U" at 3632.05,7022.59 h117.97
2: Mech6 "1U" at 4382.05,7022.59 h117.97
3: Mech6 "1U" at 5132.05,7022.59 h117.97
4: Mech6 "1U" at 3632.05,7772.59 h117.97
5: Mech6 "1U" at 4382.05,7772.59 h117.97
6: Mech6 "1U" at 5132.05,7772.59 h117.97
7: Mech6 "1U" at 3632.05,8522.59 h117.97
8: Mech6 "1U" at 4382.05,8522.59 h117.97
9: Mech6 "1U" at 5132.05,8522.59 h117.97
*1: Mech6 "1U" at 5132.05,9272.59 h117.97
+1: Mech6 "1U" at 5882.05,8147.59 h117.97
-1: Mech6 "1U" at 5882.05,9272.59 h117.97
/1: Mech6 "1U" at 4382.05,9272.59 h117.97
DEL1: Mech6 "1U" at 5132.05,6272.59 h117.97
ENTER1: Mech6 "1U" at 5882.05,6647.59 h117.97
M1: Mech6 "1U" at 3632.05,10212.59 h117.97
M2: Mech6 "1U" at 4382.05,10212.59 h117.97
M3: Mech6 "1U" at 5132.05,10212.59 h117.97
NUMLOCK1: Mech6 "1U" at 3632.05,9272.59 h117.97